# Altium PCB RS485.PcbDoc
Units mil, origin at the board's own origin, x right, y up, seen from the top; angles counter-clockwise.
Board outline 4242 x 798 mil, 2 copper layers (Top Layer, Bottom Layer); 48 components, 26 nets, 130 pads, 47 vias.
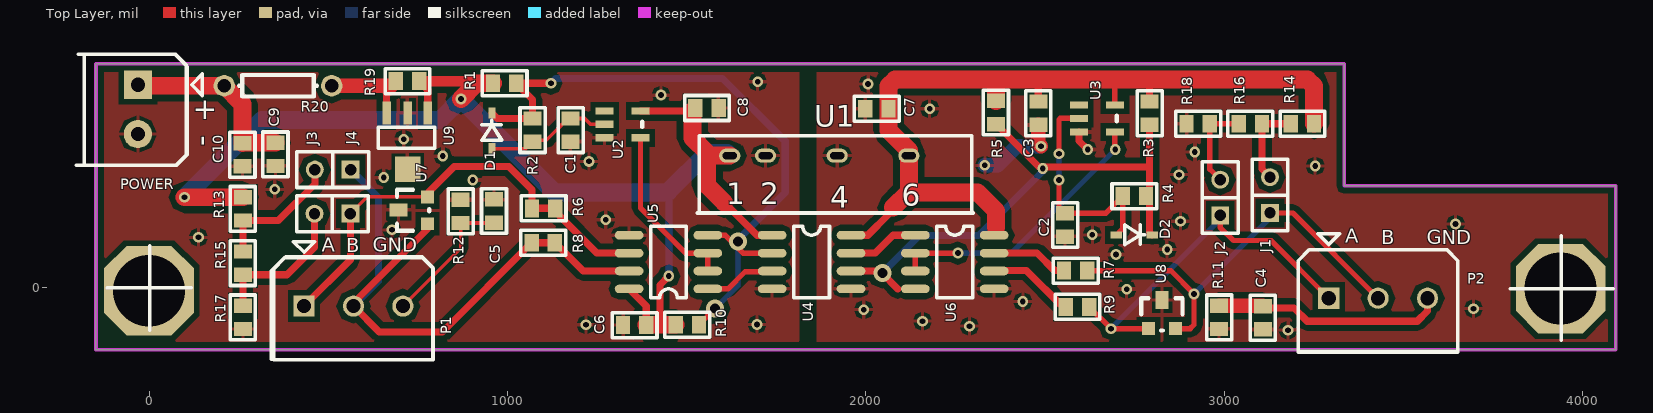
[diagram p0: Top Layer view]
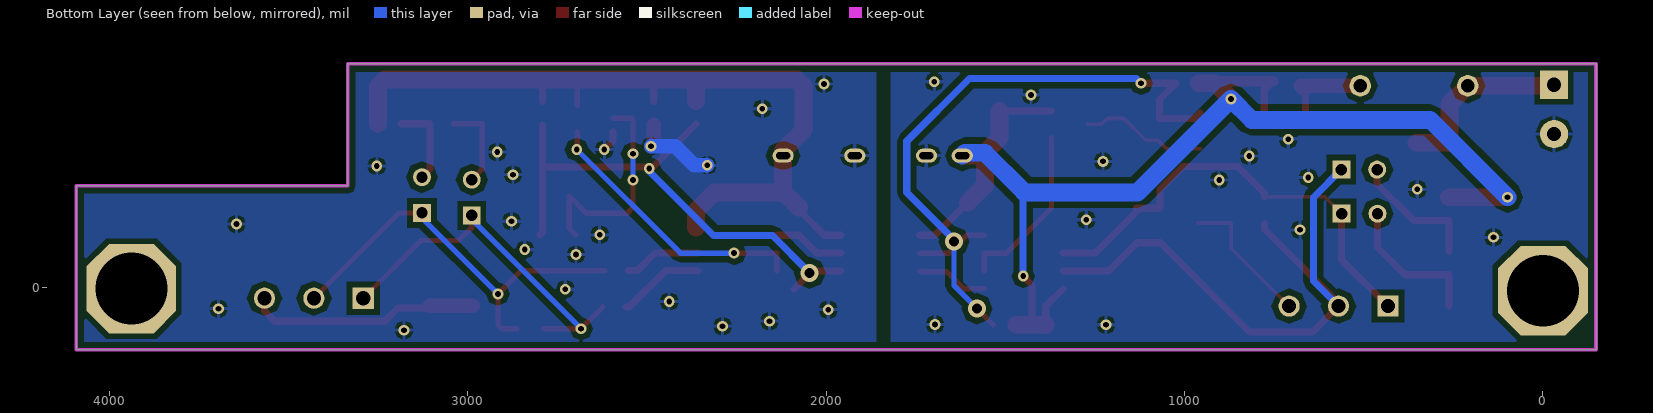
[diagram p1: Bottom Layer view, seen from below]

## Layer stack, top to bottom
Top Layer: signal copper 1.4
Dielectric: dielectric 12.6, FR-4, Dk 4.8
Bottom Layer: signal copper 1.4

## Board outline
-149,-174 -149,624 3335,624 3335,284 4093,284 4093,-174

## Design rules (kind name [scope] priority, off if disabled: settings)
Clearance [All] p1 off: gap=16
Clearance Clearance_1 [All] p2: gap=10
MinimumSolderMaskSliver [All] p1 off: minsoldermaskwidth=10
NetAntennae [All] p1 off: netantennaetolerance=0
PolygonConnect [All] p1: connectstyle=Relief reliefconductorwidth=10 reliefentries=4 polygonreliefangle="90 Angle" airgapwidth=10
RoutingTopology [All] p1: topology=Daisy_Balanced
RoutingVias [All] p1: holewidth=16 width=30 viastyle="Through Hole" minholewidth=12 minwidth=20 maxholewidth=40 maxwidth=60
SilkToSilkClearance [All] p1 off: silktosilkclearance=10
SilkToSolderMaskClearance [IsPad] p1 off: minsilkscreentomaskgap=10 clearancetoexposedcopper=TRUE
SolderMaskExpansion [All] p1: expansion=4
Width [All] p1: maxlimit=50 minlimit=10 preferedwidth=12
23 further rules are at their usual default settings.

## Components (designator, comment, footprint, x,y, rotation, side; value= is the part's Value field where it differs from the comment)
C1 "100pF" CC0603 1175.81,406.75 r90 top
C2 "100pF" CC0603 2556,142 r90 top
C3 "0.1uF" CC0603 2481.33,519 r270 top
C4 "4700pF" CC0603 3108,-116.99 r90 top
C5 "4700pF" CC0603 962,246 r270 top
C6 "Cap" CC0603 1387,-105 r180 top
C7 "0.1uF" CC0603 2063,499 r180 top
C8 "0.1uF" CC0603 1524,501 r0 top
C9 "4.7uF" CC0603 352,404 r270 top
C10 "0.1uF" CC0603 260,403 r270 top
D1 "DIODE" SOD323 956,387 r90 top
D2 "DIODE" SOD323 2699,147 r0 top
J1 "JUMPER" SIP2-2.54MM 3128,208 r90 top
J2 "JUMPER" SIP2-2.54MM 2989,201 r90 top
J3 "JUMPER" SIP2-2.54MM 561,206 r180 top
J4 "JUMPER" SIP2-2.54MM 562,329 r180 top
P1 "MHDR1X3" HEADER_35MM 432,-52 r90 top
P2 "MHDR1X3" HEADER_35MM 3292,-30 r90 top
POWER "MHDR1X2" HEADER_35MM_2 -32,566 r270 top
R1 "10K" CC0603 1024,570 r180 top
R2 "10K" CC0603 1069.63,471.75 r270 top
R3 "10K" CC0603 2792,454 r90 top
R4 "10K" CC0603 2782,255 r180 top
R5 "10K" CC0603 2363,456 r90 top
R6 "10" CC0603 1068,221 r0 top
R7 "10" CC0603 2618,47 r180 top
R8 "10" CC0603 1067,125 r0 top
R9 "10" CC0603 2623,-54 r180 top
R10 "10K" CC0603 1534,-104 r180 top
R11 "1M" CC0603 2986,-51 r270 top
R12 "1M" CC0603 869,180 r90 top
R13 "590" CC0603 261,187 r90 top
R14 "590" CC0603 3186,457 r0 top
R15 "133" CC0603 261,35.5 r90 top
R16 "133" CC0603 3040.5,457 r0 top
R17 "590" CC0603 261,-116 r90 top
R18 "590" CC0603 2895,457 r0 top
R19 "0" CC0603 753,576 r180 top
R20 "100-W" AXIAL-0.3 509,563 r180 top
U1 "B0505LS-1WR2" B0505LS-1WR2 1620,368 r0 top
U2 "74HC1G14" SOT-23-5 1271,492.75 r90 top
U3 "74HC1G14" SOT-23-5 2595,509 r90 top
U4 "ADUM1201ARZ" SO-8 1738.5,146 r0 top
U5 "MAX3485" SO-8 1559,-4 r180 top
U6 "MAX3485" SO-8 2138,146 r0 top
U7 "SM712" SOT-23W 776,178 r90 top
U8 "SM712" SOT-23W 2789,-115 r0 top
U9 "78L05" SOT-89 777,487 r180 top

## Footprints (in the part's own frame and the unit in brackets; to place one, negate y for a bottom-side part, rotate by r counter-clockwise, add the part's x,y. Pads: shape width x height; smd on the part's side, far side on the other; paste and mask are expansions set on the pad)
AXIAL-0.3 [mil] "Resistor"
  round 60 hole 38: 1(0,0) 2(300,0)
  silkscreen extent 41,-30 259,30
B0505LS-1WR2 [mm]
  oval 1.5x1 hole 0.5 slot 1 at 0 deg: 1(0,0) 2(2.54,0) 4(7.62,0) 6(12.7,0)
  silkscreen extent -2.29,-4.06 17.27,1.4
CC0603 [mil]
  rect 40x50 smd: 1(0,0) 2(65,0)
  silkscreen extent -30,-35 95,35
HEADER_35MM [mm]
  rect 1.5x1.5 hole 1: 1(0,0)
  round 1.5 hole 1: 2(0,-3.5) 3(0,-7)
  silkscreen extent -3.81,-9.14 4.57,2.16
HEADER_35MM_2 [mm]
  rect 2x2 hole 1: 1(0,0)
  round 2 hole 1: 2(3.5,0)
  silkscreen extent -2.16,-3.81 5.72,4.57
SIP2-2.54MM [mil]
  rect 50x50 hole 32: 1(0,0)
  round 50 hole 32: 2(100,0)
  silkscreen extent -50,-50 150,50
SO-8 [mil] "SO8"
  oval 80x24 smd: 1(0,0) 2(0,-50) 3(0,-100) 4(0,-150) 5(220,-150) 6(220,-100) 7(220,-50) 8(220,0)
  silkscreen extent 60,-175 160,25
SOD323 [mm]
  rect 0.8x0.5 smd: 1(0,0) 2(2.54,0)
  silkscreen extent 0.61,-0.7 2.01,0.7
SOT-23-5 [mil] "SOT23-5"
  rect 20x50 smd: 1(0,0) 2(-37,0) 3(-75,0) 4(-75,-100) 5(0,-100)
  silkscreen extent -45,-105 -30,-105
SOT-23W [mil]
  rect 35.98x35.98 smd: 1(0,0) 2(75,0)
  rect 35.98x50 smd: 3(37.99,80)
  silkscreen extent -20,-5 95,85
SOT-89 [mm]
  rect 0.6x1.6 smd: 1(0,0) 2(1.42,0) 3(2.92,0)
  rect 1.8x1.8 smd: 2(1.42,4)
  silkscreen extent -0.5,1 3.5,2.5

## Part data
C1 C2 C3 C4 C5 C7 C8 C9 C10: library part Cap, "Capacitor"
C6: "Capacitor"
P1 P2: "Header, 3-Pin"
POWER: "Header, 2-Pin"
R1 R2 R3 R4 R5 R6 R7 R8 R9 R10 R11 R12 R13 R14 R15 R16 R17 R18 R19 R20: library part Res2, "Resistor"
U9: "CI-78L05"

## Free pads (board coordinates)
  oct 250x250 hole 200: 0(-1,-9) 0(3939,-3)

## Via types
v1: diameter 30, hole 16, Top Layer to Bottom Layer, 44 vias
v2: diameter 50, hole 28, Top Layer to Bottom Layer, 3 vias

## Nets (pads, with @x,y where several pads share a name; then routed paths per layer and width w, separated by ;. In a path a pad name is that pad's centre, name@x,y a point inside that pad or via, vN(x,y) a via of type N, cw(c..) or ccw(c..) an arc to the next point about the centre after c; other vN are vias at no path point)
+5V: C6.1 C8.1 R1.2 R10.2 R13.2 R19.1 U1.1 U2.5 U4.1 U5.8 U9.1 | length 3612.4
  Top Layer w20: R19.1 777,552 U9.1 ; U5.8 1387,-52 C6.1 ; U2.5 C8.1@1515.75,492.75 ; 1425,-104 1425,7 v1(1450,32) ; 1604.5,237.5 1696,146 U4.1
  Top Layer w30: R19.1 R1.2@953,576
  Top Layer w50: v1(98,252) R13.2 ; v1(870,526) 914,570 R1.2 ; C6.1 1388,-104 1425,-104 R10.2 ; C8.1@1515.75,492.75 1515.75,417.25 1557,376 1557,285 1604.5,237.5 ; 1565,368 U1.1
  Bottom Layer w20: v1(1450,32) 1450,269
  Bottom Layer w50: v1(98,252) 314,468 812,468 v1(870,526) 1131,265 1446,265 1450,269 1557,376 1612,376 U1.1
+5V_1: C3.1 C7.1 R3.2 R5.2 R14.2 U1.6 U3.5 U4.8 U6.8 | length 2384.7
  Top Layer w15: U3.5 2695,577
  Top Layer w20: U4.8 2005,146 2063,204 2063,223 ; C3.1 2481.33,573.33 ; R3.2 2792,576
  Top Layer w50: 2075,223 2076,223 2118,265 ; 2363,168 2363,214 2312,265 2118,265 ; R5.2 2363,577 ; R14.2 3251,562 3233,580 2081,580 2063,562 C7.1 2063,439 2120,382 U1.6 2120,267 2118,265
\R\E\: U2.4 U5.2 U5.3 | length 485.9
  Top Layer w15: U2.4 1371,222 1497,96 U5.3 U5.2
\R\E\1: U3.4 U6.2 U6.3 | length 777.7
  Top Layer w15: U6.3 U6.2 v1(2257,96) ; U3.4 2695,385 v1(2696,385)
  Bottom Layer w15: v1(2257,96) 2407,96 v1(2696,385)
A1: J3.1 P1.1 R6.1 R6.2 U5.6 U7.2 | length 1285.9
  Top Layer w10: J3.1 608,253 U7.2
  Top Layer w20: P1.1 561,77 J3.1 ; U7.2 776,263 851,338 1003,338 1068,273 R6.1 R6.2 1133,212 1249,96 U5.6
A2: J2.1 P2.1 R9.1 U8.1 | length 1051.6
  Top Layer w15: R9.1 v1(2684,-115) U8.1 ; J2.1 2989,168 3026,131 3131,131 P2.1
  Bottom Layer w15: v1(2684,-115) 2989,190 J2.1
B1: J4.1 P1.2 R8.1 R8.2 U5.7 U7.1 | length 1692.7
  Top Layer w20: U7.1 776,163 569.8,-43.2 P1.2 641.8,-124 818,-124 R8.1 R8.2 1211,46 U5.7
  Bottom Layer w20: J4.1 640,251 640,18.2 P1.2
B2: J1.1 P2.2 R7.1 U8.2 | length 1181.7
  Top Layer w15: R7.1 2851,47 v1(2916,-18) 2916,-104 2905,-115 U8.2 ; J1.1 3191.8,208 P2.2
  Bottom Layer w15: v1(2916,-18) 3128,194 J1.1
GND: C1.1 C5.1 C6.2 C8.2 C9.2 C10.2 POWER.2 R12.2 R17.1 U1.2 U2.3 U4.4 U5.5 U7.3 U9.2
  other v1: 1219,-104 1696,-103 137,140 677,161 1274,189 350,274 903,300 654,307 1227,352 819,367 710,414 1428,537 1698,574
GND1: C2.1 C3.2 C4.1 C7.2 R11.2 R18.1 U1.4 U3.3 U4.5 U6.5 U8.3 | length 301.1
  Top Layer w20: U3.3 2595,409 v1(2619,385)
  Top Layer w40: C3.2 2481.33,401.67 v1(2489,394)
  Bottom Layer w40: v1(2332,341) 2368,341 2421,394 v1(2489,394)
  other v1: 3178,-119 2289,-108 2158,-94 1994,-62 3696,-59 2438,-39 2728,-5 2698,92 2841,106 2632,147 3646,177 2878,185 2874,315 3254,339 2918,378 2178,499 2006,568
NetC1_2: C1.2 D1.1 R2.2 U2.2 | length 356.7
  Top Layer w10: D1.1 1049.88,387 R2.2 1073.88,411 1108,411 1168.75,471.75 C1.2 1215.25,471.75 1231.25,455.75 U2.2
NetC2_2: C2.2 D2.1 R4.2 U3.2 | length 622
  Top Layer w15: v1(2539,300) 2539,224 C2.2 2669,207 R4.2 2717,165 D2.1 ; v1(2539,373) 2539,468 2543,472 U3.2
  Bottom Layer w15: v1(2539,300) v1(2539,373)
NetC4_2: C4.2 P2.3 R11.1 | length 646.7
  Top Layer w20: C4.2@3107.01,-51 C4.2 3113.01,-57 3195,-57 3232,-94 3539,-94 3567.59,-65.41 P2.3
  Top Layer w40: R11.1 C4.2@3107.01,-51
NetC5_2: C5.2 P1.3 R12.1 | length 392.3
  Top Layer w10: P1.3 869,109.41 R12.1 961,180 C5.2
NetJ1_2: J1.2 R14.1 R16.2 | length 238.8
  Top Layer w20: J1.2 3105.5,330.5 R16.2 R14.1
NetJ2_2: J2.2 R16.1 R18.2 | length 248.5
  Top Layer w15: J2.2 2960,330 R18.2 R16.1
NetJ3_2: J3.2 R15.1 R17.2 | length 412.2
  Top Layer w20: R17.2 R15.1 384.5,35.5 461,112 J3.2
NetJ4_2: J4.2 R13.1 R15.2 | length 369.7
  Top Layer w20: R15.2 R13.1 360,187 462,289 J4.2
NetR7_2: R7.2 U6.7 | length 215.3
  Top Layer w20: U6.7 2478,96 2527,47 R7.2
NetR9_2: R9.2 U6.6 | length 242.9
  Top Layer w20: U6.6 2359.79,47.79 2447.79,47.79 2549.57,-54 R9.2
NetR19_2: R19.2 R20.1 U9.3 | length 247.4
  Top Layer w20: U9.3 662.04,550.04 667,555
  Top Layer w40: R20.1 675,563 667,555
NetU4_3: U4.3 U5.1 | length 200.2
  Top Layer w15: U5.1 1615,-4 1663,44 1736.5,44 U4.3
NetU4_7: U4.7 U6.1 | length 200.2
  Top Layer w20: U4.7 2026,96 2076,146 U6.1
TX: D1.2 R1.1 R2.1 R10.1 U4.2 U5.4 | length 1887.1
  Top Layer w15: R10.1 v2(1579,-59) ; U5.4 1607,146 v2@1634,119 ; v2(1643,128) v2@1634,119 ; U4.2 1657,96 v2@1634,119
  Top Layer w20: D1.2 971.25,471.75 R2.1 1069.63,524.37 R1.1 v1(1121,570)
  Bottom Layer w15: v2(1579,-59) 1643,5 v2(1643,128)
  Bottom Layer w20: v1(1121,570) 1134,583 1600,583 1775,408 1775,265 v2@1642,132
TX1: D2.2 R3.1 R4.1 R5.1 U4.6 U6.4 | length 1501.5
  Top Layer w20: U4.6 2039,46 2045,40 v2@2046,39 ; v2(2046,41) v2@2046,39 ; 2089,-4 v2@2046,39 ; R5.1 v1@2483,336 ; v1@2494,336 2790,336 ; R3.1 2792,255 2792,154 D2.2
  Bottom Layer w20: v2(2046,41) 2150,145 2314,145 2494,325 v1(2494,332)
VCC: C9.1 C10.1 POWER.1 R20.2 | length 515.8
  Top Layer w50: POWER.1 -29,563 R20.2 260,512 C10.1 261,404 C9.1
pads on no net: U2.1 U3.1

## Polygon pours and split planes (outlines as drawn)
GND on Top Layer "Top Layer-No Net" (solid, remove dead copper, pour order 10): 1814,-149 1814,627 1809,632 -159,632 -159,-169 -142,-186 1797,-186 1819,-164
GND1 on Top Layer "Top Layer-No Net" (solid, remove dead copper, pour order 6): 1863,638 1863,-175 1876,-188 4094,-188 4101,-181 4101,290 4099,292 3337,292 3334,295 3334,618 3317,635 1863,635 1858,640
GND on Bottom Layer "Top Layer-No Net" (solid, remove dead copper, pour order 12): -159,644 -159,-173 -146,-186 1805,-186 1819,-172 1819,627 1802,644 -147,644 -154,637
GND1 on Bottom Layer "Top Layer-No Net" (solid, remove dead copper, pour order 8): 1860,635 1860,-151 1866,-157 1880,-171 3259,-171 4101,-171 4121,-151 4107,-137 4107,179 4107,246 4044,309 3356,309 3349,302 3340,311 3340,401 3340,619 3335,624 3327,632 1855,632

## Keep-outs
Keep-Out Layer:
  lines w10: -149,-174 4093,-174 4093,284 3335,284 3335,624 -149,624 -149,254 -149,-174

## Silkscreen, mask and mechanical layers (free items; w line width, h text height)
Top Overlay:
  lines w10: -204,341 76,341 106,371 106,616 71,651 -199,651 ; -118,-1 117,-1 ; 1,-119 1,115.71 ; 341,-200.05 341,46 381,86 761,86 791,56 791,-200.05 ; 3798,-4 4086,-4 ; 3941,-147 3941,-4 3941,144
  text "+" at 121,469 h60
  text "-" at 173,394 h60 r90
  text "A" at 3338,125 h40
  text "B" at 3439,120 h40
  text "GND" at 3566,120 h40
  text "A" at 481,100 h40
  text "GND" at 623,100 h40
  text "B" at 550,98 h40

## Text inside footprints (layer, text, board x,y; h text height)
U1: Top Overlay "1" at 1610,233 h60; Top Overlay "2" at 1705,233 h60; Top Overlay "4" at 1900,223 h60; Top Overlay "6" at 2100,228 h60